# Altium PCB LockDoor.PcbDoc
Units mm, origin at the board's own origin, x right, y up, seen from the top; angles counter-clockwise.
Board outline 100 x 100 mm, 2 copper layers (Top Layer, Bottom Layer); 37 components, 57 nets, 201 pads, 84 vias.
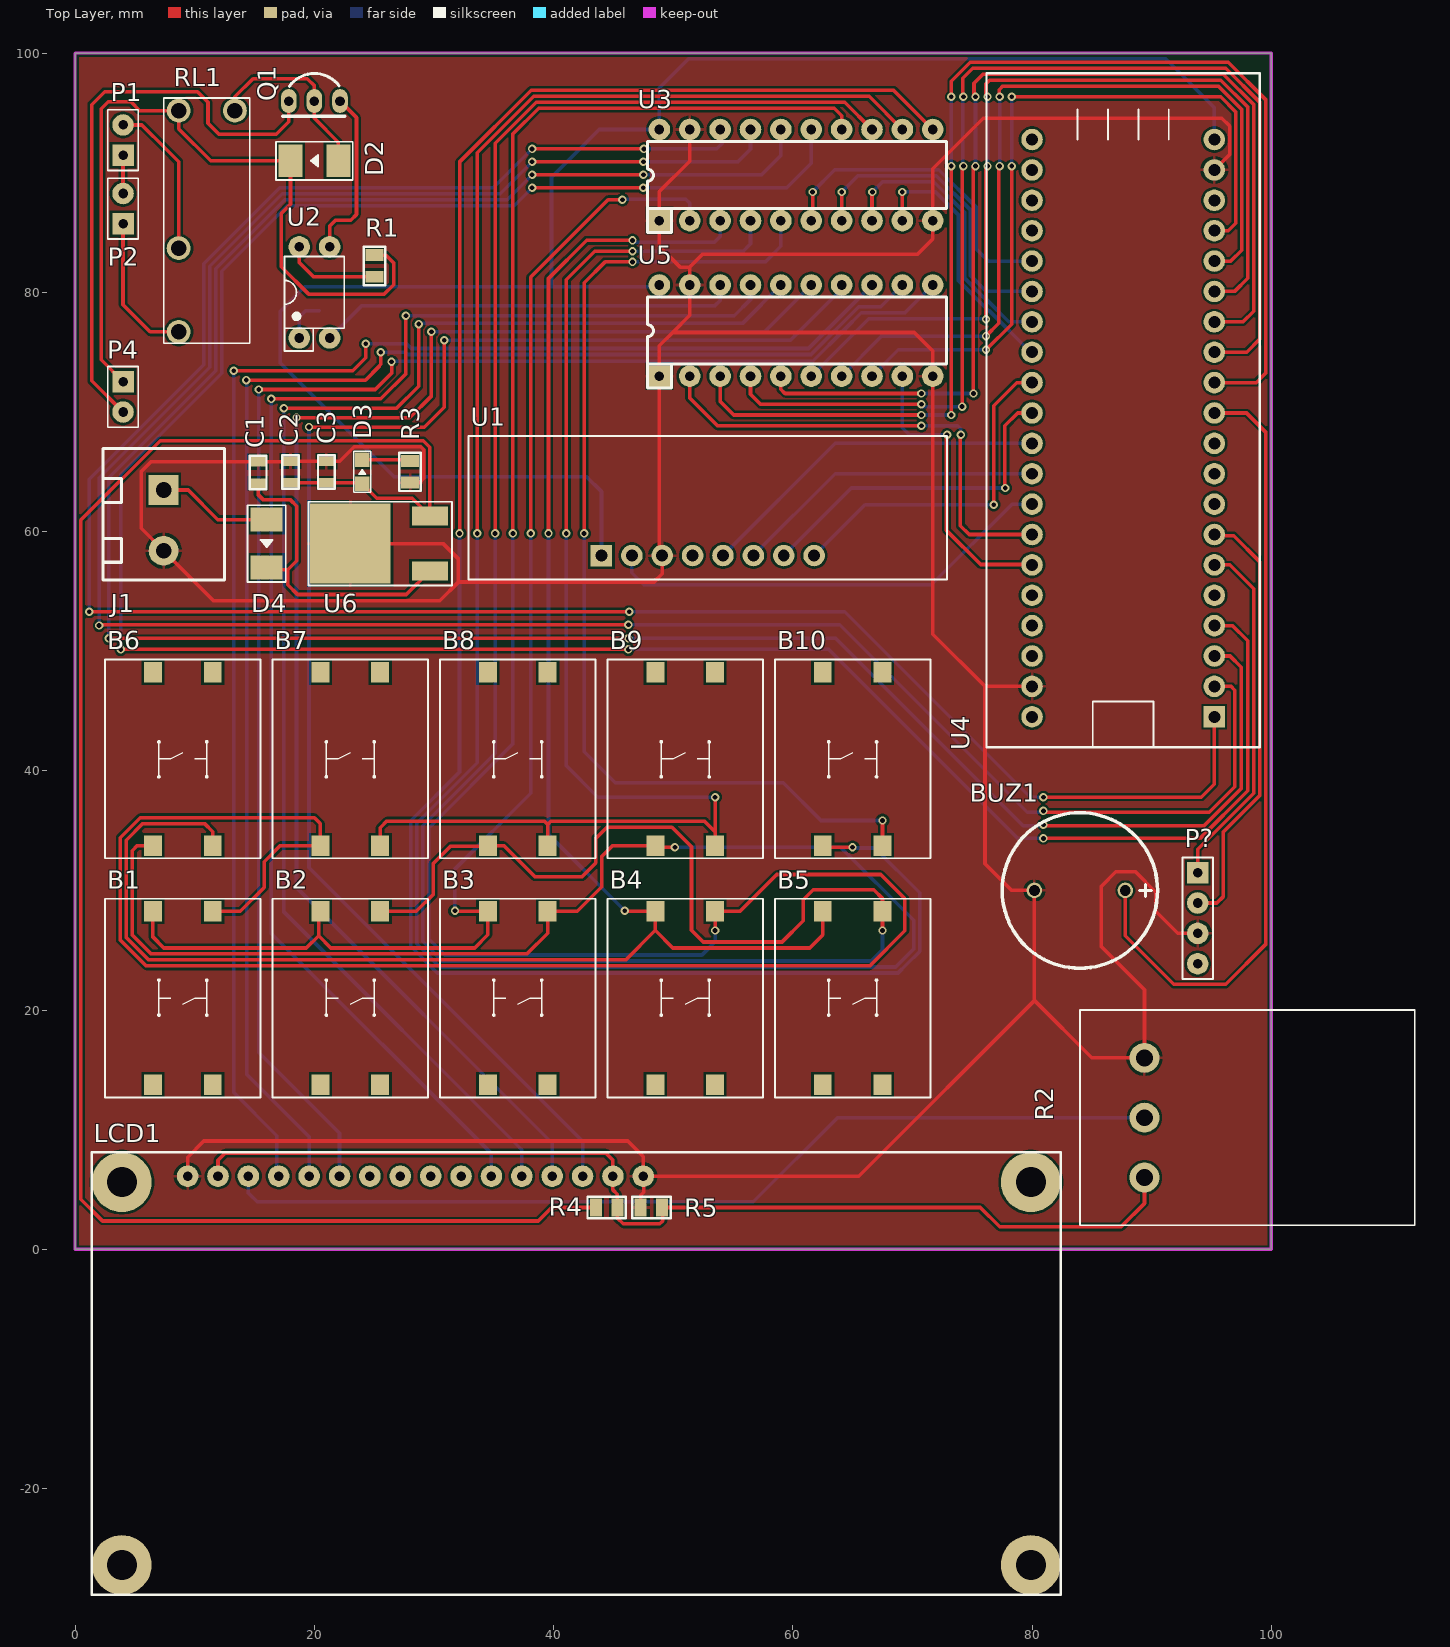
[diagram p0: Top Layer view]
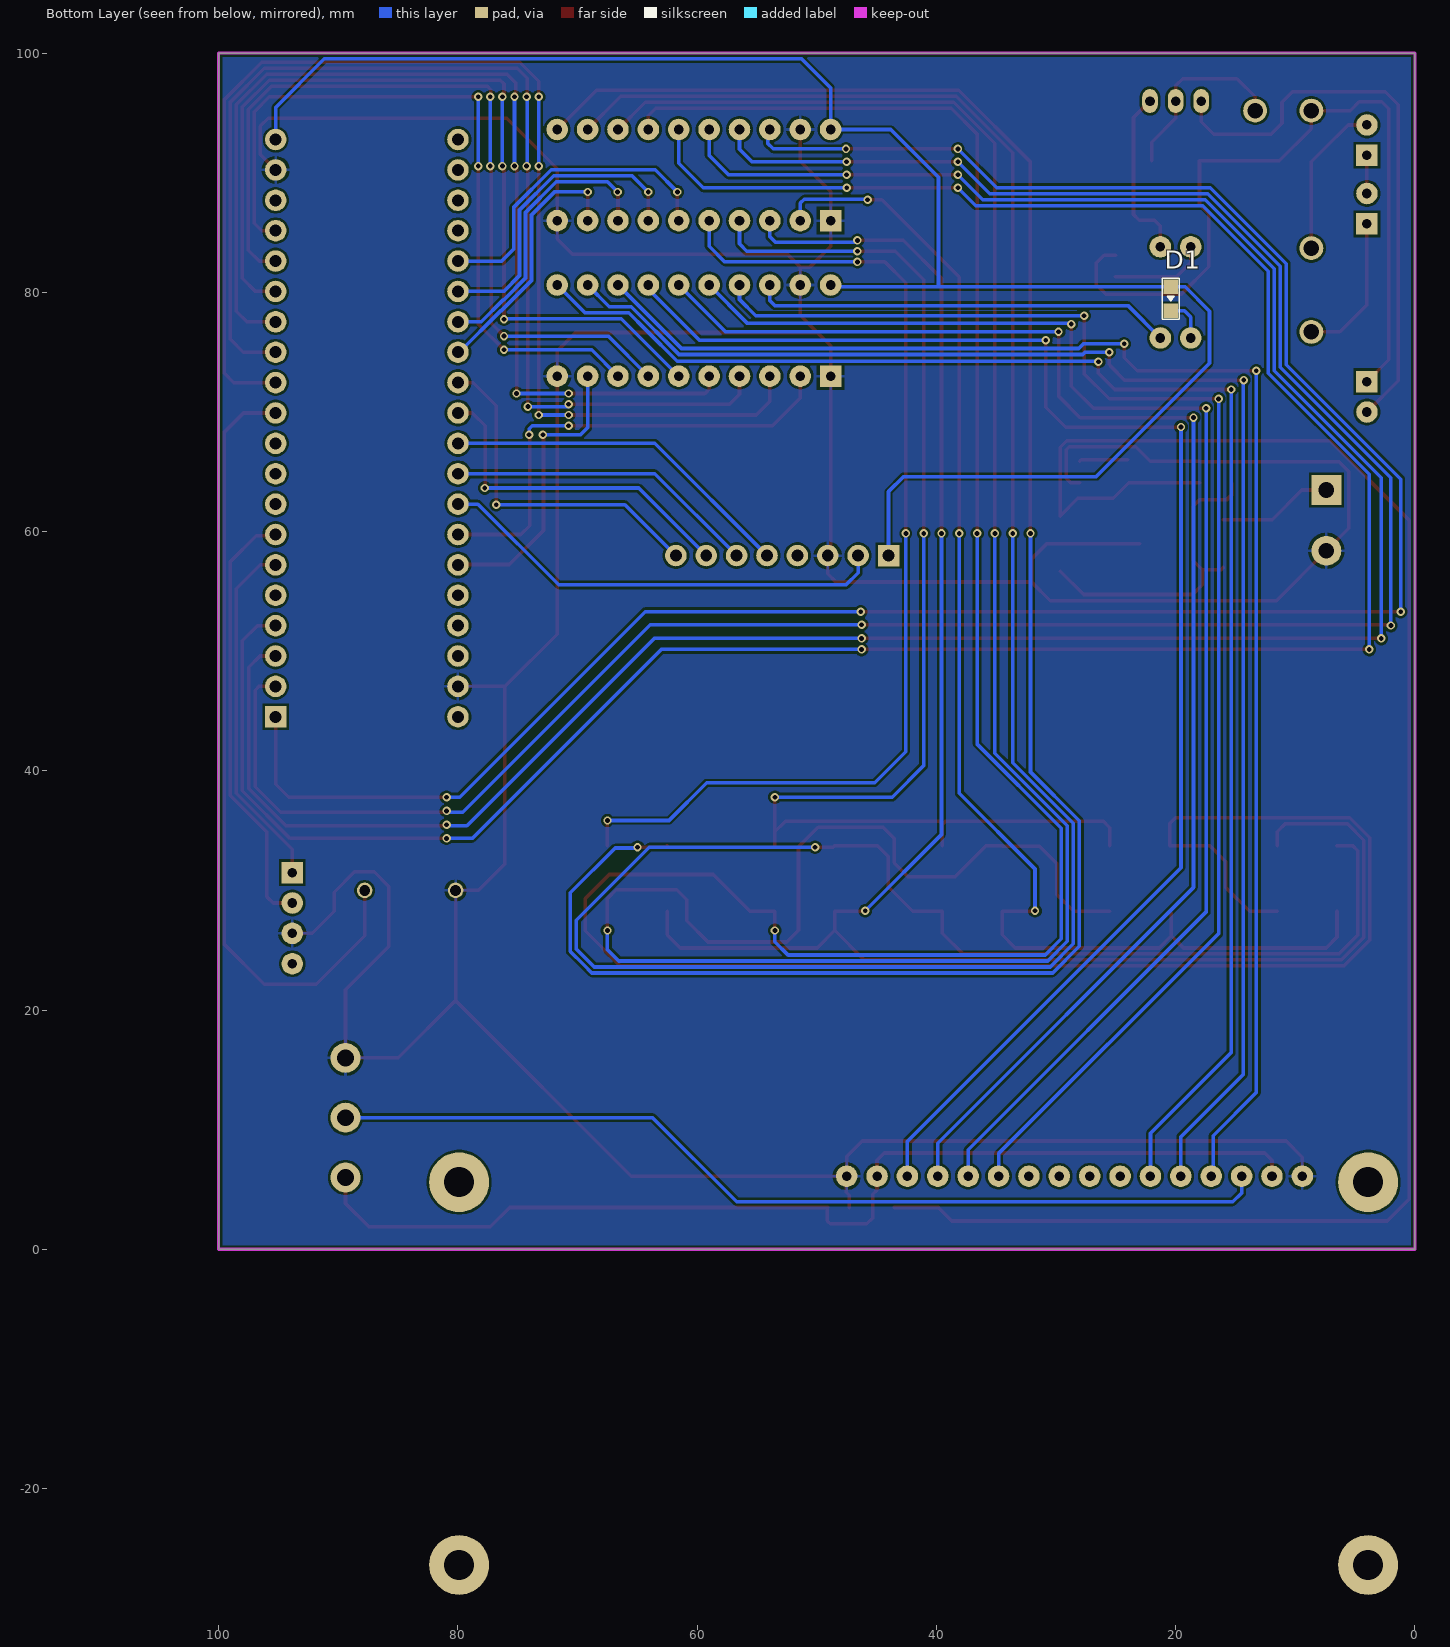
[diagram p1: Bottom Layer view, seen from below]
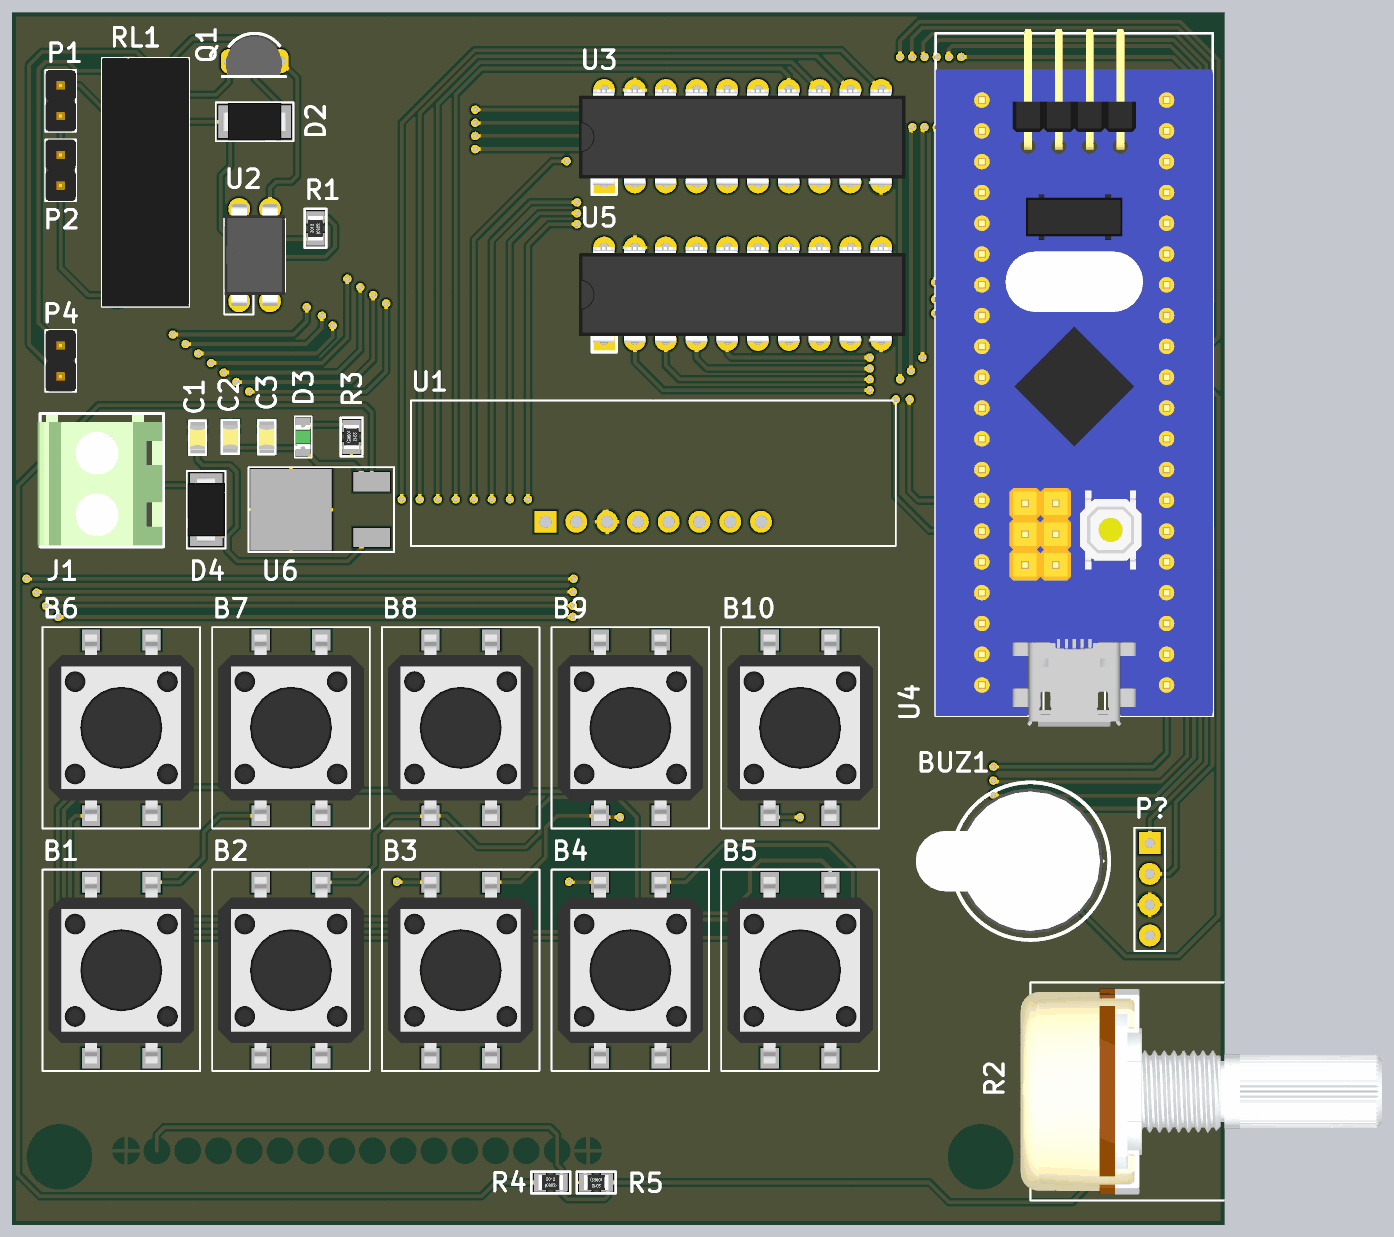
[diagram p2: 3D render of the assembled board from above, using the file's embedded part models]

## Layer stack, top to bottom
Top Solder: solder mask 0.0102, Solder Resist, Dk 3.5
Top Layer: signal copper 0.0356
Dielectric 1: dielectric 0.32, FR-4, Dk 4.8
Bottom Layer: signal copper 0.0356
Bottom Solder: solder mask 0.0102, Solder Resist, Dk 3.5

## Board outline
0,0 100,0 100,100 0,100

## Design rules (kind name [scope] priority, off if disabled: settings)
Clearance [All] p1: gap=0.2 ignorepadtopadclearanceinfootprint=FALSE
PolygonConnect [All] p1: connectstyle=Relief reliefconductorwidth=0.254 reliefentries=4 polygonreliefangle="90 Angle" airgapwidth=0.254
RoutingVias [All] p1: holewidth=0.4 width=0.7 viastyle="Through Hole" minholewidth=0.4 minwidth=0.7 maxholewidth=0.4 maxwidth=0.7
SolderMaskExpansion [All] p1: expansion=0.102 istentingtop=FALSE
Width [All] p1: maxlimit=0.3 minlimit=0.3 preferedwidth=0.3
30 further rules are at their usual default settings.

## Classes and differential pairs
component class Mircocontroller: C1 C2 C3 D3 D4 J1 P4 P? R3 R4 R5 U4 U5 U6
component class Interface: B1 B2 B3 B4 B5 B6 B7 B8 B9 B10 U3
component class Actuator: BUZ1 D1 D2 LCD1 P1 P2 Q1 R1 R2 RL1 U1 U2

## Components (designator, comment, footprint, x,y, rotation, side; value= is the part's Value field where it differs from the comment)
B1 "Button" BUTTON_B3F_SMD 9,21 r270 top
B2 "Button" BUTTON_B3F_SMD 23,21 r270 top
B3 "Button" BUTTON_B3F_SMD 37,21 r270 top
B4 "Button" BUTTON_B3F_SMD 51,21 r270 top
B5 "Button" BUTTON_B3F_SMD 65,21 r270 top
B6 "Button" BUTTON_B3F_SMD 9,41 r90 top
B7 "Button" BUTTON_B3F_SMD 23,41 r90 top
B8 "Button" BUTTON_B3F_SMD 37,41 r90 top
B9 "Button" BUTTON_B3F_SMD 51,41 r90 top
B10 "Button" BUTTON_B3F_SMD 65,41 r90 top
BUZ1 "Buzzer" Buzzer_7.6 84,30 r180 top
C1 "100nF" CAPC0805 15.29,64.94 r270 top
C2 "100nF" CAPC0805 18,65 r270 top
C3 "100nF" CAPC0805 21,64.98 r270 top
D1 "LED_Green" "LED SMD 0805" 20.4,79.47 r270 bottom
D2 "1N400x" 1N4007-M7 20,91 r180 top
D3 "LED_Green" "LED SMD 0805" 24,65 r90 top
D4 "1N400x" 1N4007-M7 16,59 r270 top
J1 "Domino 2 Pin" domino_2_pin 7.39,60.94 r270 top
LCD1 "LCD1602A" LCD1602A 41,-9.99 r0 top
P1 "Header 1*2 Pins" HDR_M_2_PINS_2.54 4,92.73 r90 top
P2 "Header 1*2 Pins" HDR_M_2_PINS_2.54 4,87 r90 top
P4 "Header 1*2 Pins" HDR_M_2_PINS_2.54 4,71.27 r270 top
P? "Header 1*4 Pins" HDR_M_4_PINS_2.54 93.85,27.68 r270 top
Q1 "NPN" to-92 20,96 r0 top
R1 "10kR" RESC0805 25.02,82.21 r90 top
R2 "POT" WH148-3P 96,11 r90 top
R3 "220R" RESC0805 28,65 r270 top
R4 "220R" RESC0805 44.43,3.49 r0 top
R5 "620R" RESC0805 48.18,3.49 r180 top
RL1 "Relay" "Relay G5NB" 11,86 r270 top
U1 "RFID" "RFID RC 522 Module" 52.89,58 r180 top
U2 "Optocoupler" "DIP 4" 20,80 r90 top
U3 "Non-Inverting Buffer" DIP_20 48.84,86 r90 top
U4 "STM32F103C8T6_BluePill" STM32F103C8T6_BluePill 87.62,68.65 r180 top
U5 "Non-Inverting Buffer" DIP_20 48.84,73 r90 top
U6 "LM7805" TO-252 23,59 r0 top

## Footprints (in the part's own frame and the unit in brackets; to place one, negate y for a bottom-side part, rotate by r counter-clockwise, add the part's x,y. Pads: shape width x height; smd on the part's side, far side on the other; paste and mask are expansions set on the pad)
1N4007-M7 [mm] "1N4007-M7"
  rect 2x2.7 smd: 1(-2,0) 2(2,0)
  silkscreen extent -3.2,-1.6 3.2,1.6, body extent -2.65,-1.55 2.65,1.55, height 2.5
BUTTON_B3F_SMD [mm] "4 Pins, SMD"
  rect 1.7x1.5 smd: 1(-7.25,2.5) 2(-7.25,-2.5) 3(7.25,2.5) 4(7.25,-2.5)
  silkscreen extent -8.3,-6.5 8.3,6.5, body extent -7.68,-6.01 7.68,6.01, height 7
Buzzer_7.6 [mm]
  round 1.3 hole 0.9: 1(-3.8,0) 2(3.8,0)
  silkscreen extent -6.5,-6.5 6.5,6.5, body extent -6,-6 9.45,6, height 9.65
CAPC0805 [mm] "Length: 2mm, Width: 1.3mm"
  rect 0.8x1.3 smd: 1(-0.9,0) 2(0.9,0)
  silkscreen extent -1.4,-0.7 1.4,0.7, body extent -1,-0.62 1,0.63, height 0.8
"DIP 4" [mm]
  round 1.8 hole 0.8: 1(-3.81,1.27) 2(-3.81,-1.27) 3(3.81,-1.27) 4(3.81,1.27)
  silkscreen extent -4.9,-2.5 3,2.5, body extent -4.57,-2.5 4.57,2.5, height 3.6
DIP_20 [mm]
  rect 1.8x1.8 hole 0.8: 1(0,0)
  round 1.8 hole 0.8: 2(0,-2.54) 3(0,-5.08) 4(0,-7.62) 5(0,-10.16) 6(0,-12.7) 7(0,-15.24) 8(0,-17.78) 9(0,-20.32) 10(0,-22.86) 11(7.62,-22.86) 12(7.62,-20.32) 13(7.62,-17.78) 14(7.62,-15.24) 15(7.62,-12.7) 16(7.62,-10.16) 17(7.62,-7.62) 18(7.62,-5.08) 19(7.62,-2.54) 20(7.62,0)
  silkscreen extent -1,-24 6.6,1, body extent -0.2,-24.86 7.67,2.06, height 5.33
domino_2_pin [mm]
  rect 2.5x2.5 hole 1.3: 1(-2.54,0)
  round 2.5 hole 1.3: 2(2.54,0)
  silkscreen extent -6,-5.08 5,5.08, body extent -5.88,-5.3 4.88,5, height 14.19
HDR_M_2_PINS_2.54 [mm] "0.65x0.45, Male, distance = 2.54mm, straight"
  rect 1.8x1.8 hole 0.8: 1(-1.27,0)
  round 1.8 hole 0.8: 2(1.27,0)
  silkscreen extent -2.54,-1.27 2.54,1.27, body extent -2.54,-1.27 2.54,1.27, height 9.89
HDR_M_4_PINS_2.54 [mm] "0.65x0.45, Male, distance = 2.54mm, straight"
  rect 1.8x1.8 hole 0.8: 1(-3.81,0)
  round 1.8 hole 0.8: 2(-1.27,0) 3(1.27,0) 4(3.81,0)
  silkscreen extent -5.08,-1.27 5.08,1.27, body extent -5.08,-1.2 5.08,1.3, height 8.66
LCD1602A [mm]
  round 1.8 hole 0.8: 1(-31.6,16.1) 2(-29.06,16.1) 3(-26.52,16.1) 4(-23.98,16.1) 5(-21.44,16.1) 6(-18.9,16.1) 7(-16.36,16.1) 8(-13.82,16.1) 9(-11.28,16.1) 10(-8.74,16.1) 11(-6.2,16.1) 12(-3.66,16.1) 13(-1.12,16.1) 14(1.42,16.1) 15(3.96,16.1) 16(6.5,16.1)
  round 5 hole 2.5: 18(-37.1,15.6) 19(38.9,15.6) 20(38.9,-16.4) 21(-37.1,-16.4)
  silkscreen extent -39.6,-18.9 41.4,18.1, body extent -39.6,-17.9 40.4,18.1, height 9.8
"LED SMD 0805" [mm] "SMD 0805"
  rect 1.2x1.2 smd: 1(-1,0) 2(1,0)
  silkscreen extent -1.7,-0.7 1.7,0.7, body extent -1,-0.63 1,0.62, height 0.8
"Relay G5NB" [mm] "4 Pins"
  round 2 hole 1.3: 1(-9.2,-2.35) 2(2.3,-2.35) 3(9.3,-2.35) 4(-9.2,2.35)
  silkscreen extent -10.25,-3.6 10.25,3.6, body extent -10.25,-3.6 10.25,3.6, height 15.3
RESC0805 [mm] "Length: 2mm, Width: 1.3mm"
  rect 1x1.5 smd: 1(-0.9,0) 2(0.9,0)
  silkscreen extent -1.6,-0.9 1.6,0.9, body extent -1,-0.63 1,0.63, height 0.45
"RFID RC 522 Module" [mm]
  rect 1.8x1.8 hole 1: 1(8.89,0)
  round 1.8 hole 1: 2(6.35,0) 3(3.81,0) 4(1.27,0) 5(-1.27,0) 6(-3.81,0) 7(-6.35,0) 8(-8.89,0)
  silkscreen extent -20,-10 20,2
STM32F103C8T6_BluePill [mm] "STM32F103C8T6_BluePill"
  rect 1.8x1.8 hole 1: 1(-7.62,24.13)
  round 1.8 hole 1: 2(-7.62,21.59) 3(-7.62,19.05) 4(-7.62,16.51) 5(-7.62,13.97) 6(-7.62,11.43) 7(-7.62,8.89) 8(-7.62,6.35) 9(-7.62,3.81) 10(-7.62,1.27) 11(-7.62,-1.27) 12(-7.62,-3.81) 13(-7.62,-6.35) 14(-7.62,-8.89) 15(-7.62,-11.43) 16(-7.62,-13.97) 17(-7.62,-16.51) 18(-7.62,-19.05) 19(-7.62,-21.59) 20(-7.62,-24.13) 21(7.62,-24.13) 22(7.62,-21.59) 23(7.62,-19.05) 24(7.62,-16.51) 25(7.62,-13.97) 26(7.62,-11.43) 27(7.62,-8.89) 28(7.62,-6.35) 29(7.62,-3.81) 30(7.62,-1.27) 31(7.62,1.27) 32(7.62,3.81) 33(7.62,6.35) 34(7.62,8.89) 35(7.62,11.43) 36(7.62,13.97) 37(7.62,16.51) 38(7.62,19.05) 39(7.62,21.59) 40(7.62,24.13)
  silkscreen extent -11.43,-29.67 11.43,26.67, body extent -11.43,-30.01 11.43,27.55, height 12.77
to-92 [mm] "TO-92"
  oval 1.3x2 hole 0.8: 1(-2.14,0) 2(0,0) 3(2.14,0)
  silkscreen extent -2.66,-1.27 2.54,2.3, body extent -2.38,-1.14 2.26,2.06, height 5
TO-252 [mm] "DPAK"
  rect 3x1.6 smd: 1(6.65,-2.3) 3(6.65,2.3)
  rect 6.7x6.7 smd: 2(0,0)
  silkscreen extent -3.5,-3.5 8.5,3.5, body extent -2.15,-3.21 6.55,3.29, height 2.5
WH148-3P [mm] "3 Pins, 0.125W, WH148"
  round 2.5 hole 1.4: 1(-5,6.6) 2(0,6.6) 3(5,6.6)
  silkscreen extent -9,-16 9,12, body extent -8.5,-17 8.5,12.8, height 23.5

## Part data
B1 B2 B3 B4 B5 B6 B7 B8 B9 B10: "6x6mm, TH, 2 Pins"
C1 C2 C3: library part "Capacitor Non Polar", "Capacitor_Non_Polar"
D2 D4: library part "Diode 1N4007", "1A - 1kV"
J1: "2 Pins, 5.08mm"
P1 P2 P4: library part "Header 1x2 Pins"
P?: library part "Header 1x4 Pins"
Q1: library part 2SC1815, "Transistor NPN"
R1 R3 R4 R5: library part Resistor, "Resistor_TH_1/4W"
R2: library part POT_3Pins
RL1: library part "Relay G5NB", "4 Pins"
U1: library part "RFID RC522 Module"
U2: "Opto"
U3 U5: library part 74HC541
U4: "STM32F103C8T6 BluePill"
U6: "5V, 1A"

## Via types
v1: diameter 0.7, hole 0.4, Top Layer to Bottom Layer, 84 vias

## Nets (pads, with @x,y where several pads share a name; then routed paths per layer and width w, separated by ;. In a path a pad name is that pad's centre, name@x,y a point inside that pad or via, vN(x,y) a via of type N, cw(c..) or ccw(c..) an arc to the next point about the centre after c; other vN are vias at no path point)
3.7V: LCD1.2 LCD1.15 R2.1 R4.2 R5.1 | length 89.1
  Top Layer w0.3: LCD1.2 11.94,7.44 12.55,8.05 44.35,8.05 44.96,7.44 LCD1.15 44.96,4.96 45.33,4.59 R4.2 45.33,2.61 45.82,2.12 48.88,2.12 49.13,2.37 49.13,3.44 R5.1 75.67,3.49 77.29,1.87 87.44,1.87 89.4,3.83 R2.1
3V3: D1.1 U1.1 U3.20 U4.20 U5.20 | length 148.6
  Bottom Layer w0.3: U1.1 44,63.35 42.75,64.6 26.65,64.6 17.16,74.09 17.16,78.43 19.2,80.47 D1.1 39.82,80.47 ; U5.20 48.69,80.47 39.82,80.47 ; U4.20 95.24,95.46 91.177,99.523 51.273,99.523 48.84,97.09 U3.20 43.82,93.62 39.82,89.62 39.82,80.47
5V: C2.2 C3.2 D3.1 R4.1 U6.3 | length 151.8
  Top Layer w0.3: C2.2 20.98,64.1 C3.2 23.92,64.08 D3.1 25.22,62.78 28.17,62.78 U6.3 29.65,67.05 29.1,67.6 22.24,67.6 7.11,67.6 0.477,60.967 0.477,4.173 2.29,2.36 38.71,2.36 39.84,3.49 R4.1
5V_O: D2.2 P4.1 R1.2 RL1.1 | length 66.1
  Top Layer w0.3: P4.1 2.17,74.37 2.17,95.35 2.76,95.94 4.66,95.94 5.4,95.2 RL1.1 8.65,93.67 11.32,91 D2.2 18,87.37 17.22,86.59 17.22,82.15 19.51,79.86 25.84,79.86 26.63,80.65 26.63,82.46 25.98,83.11 R1.2
GND: BUZ1.2 C1.1 C2.1 C3.1 J1.2 LCD1.1 LCD1.16 P?.3 R2.3 R3.2 R5.2 U1.3 U3.1 U3.10 U3.19 U4.19 U4.39 U5.1 U5.10 U5.19 U6.2 | length 398.5
  Top Layer w0.3: LCD1.1 9.4,7.7 10.75,9.05 46.2,9.05 47.5,7.75 LCD1.16 ; U6.2 30.75,59 32.04,57.71 32.04,55.79 ; R3.2 28.8,64.1 29.15,64.45 29.15,66.843 28.893,67.1 23.34,67.1 22.12,65.88 C3.1 20.99,65.89 17.99,65.89 17.94,65.84 C1.1 6.33,65.84 5.52,65.03 5.52,60.27 J1.2 11.56,54.23 30.48,54.23 32.04,55.79 ; R5.2 47.28,4.51 47.53,4.76 47.53,6.08 LCD1.16 ; U3.19 51.38,90.97 48.84,88.43 U3.1 48.84,83.85 50.57,82.12 51.38,82.12 ; U4.39 76.07,47.06 ; P?.3 92.19,26.41 90.35,28.25 90.35,29.85 88.65,31.55 87,31.55 85.8,30.35 85.8,25.3 89.4,21.7 R2.3 85,16 80.2,20.8 ; U4.19 96.523,91.523 96.523,93.907 95.86,94.57 75.92,94.57 71.7,90.35 U3.10 71.7,84.47 70.42,83.19 52.45,83.19 51.38,82.12 ; 32.04,55.79 48.39,55.79 49.08,56.48 U1.3 48.84,58.24 U5.1 48.84,75.54 49.95,76.65 ; LCD1.16 65.51,6.11 80.2,20.8 ; 49.95,76.65 70.15,76.65 71.7,75.1 U5.10 71.7,51.43 76.07,47.06 ; 49.95,76.65 51.38,78.08 U5.19 51.38,82.12 ; 76.07,47.06 76.07,32.23 78.3,30 BUZ1.2 80.2,20.8
GND_O: P4.2 Q1.1 | length 48.3
  Top Layer w0.3: P4.2 1.39,72.61 1.39,95.7 2.46,96.77 10.22,96.77 11.1,95.89 11.1,94.14 12.02,93.22 16.8,93.22 17.86,94.28 Q1.1
NetBUZ1_1: BUZ1.1 U4.11 | length 66.4
  Top Layer w0.3: BUZ1.1 87.8,26.2 91.85,22.15 96.2,22.15 99.523,25.473 99.523,28.753 99.523,68.327 97.93,69.92 U4.11
NetC1_2: C1.2 D4.2 U6.1 | length 26.3
  Top Layer w0.3: C1.2 15.29,63.1 15.74,62.65 18,62.65 18.52,62.13 18.52,57.56 17.76,56.8 ; D4.2 16.2,56.8 17.76,56.8 ; U6.1 27.69,54.74 18.59,54.74 17.76,55.57 17.76,56.8
NetD1_2: D1.2 U2.1 | length 3.6
  Bottom Layer w0.3: U2.1 18.73,77.94 19.26,78.47 D1.2
NetD2_1: D2.1 Q1.2 RL1.4 | length 15.8
  Top Layer w0.3: RL1.4 13.35,96.35 14.87,97.87 19.4,97.87 20,97.27 Q1.2 20,94.55 22,92.55 D2.1
NetD3_2: D3.2 R3.1 | length 4
  Top Layer w0.3: D3.2 27.9,66 R3.1
NetD4_1: D4.1 J1.1 | length 9.6
  Top Layer w0.3: J1.1 9.45,63.48 11.93,61 D4.1
NetLCD1_4: LCD1.4 U5.13 | length 126.2
  Top Layer w0.3: v1(13.25,73.45) 23.2,73.45 24.3,74.55 v1(24.3,75.7)
  Bottom Layer w0.3: v1(13.25,73.45) 13.25,13.1 16.85,9.5 16.85,6.28 LCD1.4 ; v1(24.3,75.7) 27.7,75.7 28.092,75.308 61.308,75.308 U5.13
NetLCD1_5: LCD1.5 U5.12 | length 127.5
  Top Layer w0.3: v1(14.3,72.667) 24.267,72.667 25.4,73.8 25.4,73.833 25.55,73.983 v1(25.55,75)
  Bottom Layer w0.3: v1@14.343,72.508 14.343,14.607 19.56,9.39 LCD1.5 ; v1(25.55,75) 27.576,75 27.768,74.808 61.515,74.808 65.507,78.8 67.34,78.8 U5.12
NetLCD1_6: LCD1.6 U5.11 | length 129.1
  Top Layer w0.3: v1(15.35,71.883) 25.083,71.883 26.45,73.25 v1(26.45,74.2)
  Bottom Layer w0.3: v1(15.35,71.883) 15.35,16.45 22.1,9.7 LCD1.6 ; v1(26.45,74.2) 26.5,74.25 61.664,74.25 64.314,76.9 65.714,78.3 69.38,78.3 U5.11
NetLCD1_11: LCD1.11 U5.17 | length 120.2
  Top Layer w0.3: v1(16.4,71.1) 25.55,71.1 27.65,73.2 27.65,74.21 v1(27.65,78.05)
  Bottom Layer w0.3: v1(16.4,71.1) 16.4,26.4 34.8,8 LCD1.11 ; v1(27.65,78.05) 55.1,78.05 56.46,79.41 U5.17
NetLCD1_12: LCD1.12 U5.16 | length 121.5
  Top Layer w0.3: v1(17.45,70.317) 26.867,70.317 28.717,72.167 v1(28.717,77.35)
  Bottom Layer w0.3: v1(17.45,70.317) 17.45,28.2 37.34,8.31 LCD1.12 ; v1@28.519,77.315 28.681,77.315 v1(28.717,77.35) 28.775,77.408 55.788,77.408 U5.16
NetLCD1_13: LCD1.13 U5.15 | length 123.1
  Top Layer w0.3: v1(18.5,69.533) 27.983,69.533 29.783,71.333 v1(29.783,76.708)
  Bottom Layer w0.3: v1(18.5,69.533) 18.5,30.25 39.88,8.87 LCD1.13 ; v1(29.783,76.708) 57.628,76.708 U5.15
NetLCD1_14: LCD1.14 U5.14 | length 125.1
  Top Layer w0.3: v1(19.55,68.75) 19.561,68.739 29.189,68.739 30.85,70.4 v1(30.85,76.008)
  Bottom Layer w0.3: v1(19.55,68.75) 19.55,31.9 42.42,9.03 LCD1.14 ; v1(30.85,76.008) 59.808,76.008 64.08,80.28 U5.14
NetP1_1: P1.1 P2.2 | length 3.2
  Top Layer w0.3: P2.2 P1.1
NetP1_2: P1.2 RL1.2 | length 13.1
  Top Layer w0.3: P1.2 5.57,94 7.56,92.01 8.65,90.92 RL1.2
NetP2_1: P2.1 RL1.3 | length 12.4
  Top Layer w0.3: P2.1 4,78.96 6.26,76.7 RL1.3
NetQ1_3: Q1.3 U2.3 | length 14.4
  Top Layer w0.3: U2.3 21.27,85.55 21.76,86.04 23.04,86.04 23.52,86.52 23.52,94.62 Q1.3
NetR1_1: R1.1 U2.4 | length 8.1
  Top Layer w0.3: U2.4 18.73,82.5 19.92,81.31 R1.1
NetU1_2: U1.2 U4.33 | length 38.1
  Bottom Layer w0.3: U1.2 46.54,56.56 47.55,55.55 64.32,55.55 71.58,55.55 78.33,62.3 U4.33
NetU1_5: U1.5 U4.31 | length 29.7
  Bottom Layer w0.3: U1.5 63.54,67.38 U4.31
NetU1_6: U1.6 U4.32 | length 26.1
  Bottom Layer w0.3: U1.6 63.54,64.84 U4.32
NetU1_7: U1.7 U4.30 | length 28.9
  Top Layer w0.3: v1(77.76,63.65) 77.72,63.61 77.72,68.84 78.8,69.92 U4.30
  Bottom Layer w0.3: U1.7 64.89,63.65 v1(77.76,63.65)
NetU1_8: U1.8 U4.29 | length 29.1
  Top Layer w0.3: v1(76.8,62.25) 76.8,70.53 78.73,72.46 U4.29
  Bottom Layer w0.3: U1.8 66.04,62.26 76.79,62.26 v1(76.8,62.25)
NetU2_2: U2.2 U5.18 | length 35.2
  Bottom Layer w0.3: U2.2 23.98,78.9 53.5,78.9 53.92,79.32 U5.18
NetU3_6: U3.6 U4.25 | length 26.8
  Top Layer w0.3: U3.6 61.65,86.11 v1(61.65,88.4)
  Bottom Layer w0.3: v1(61.65,88.4) 63.5,90.25 72.2,90.25 75.35,87.1 75.35,83.6 76.33,82.62 U4.25
NetU3_7: U3.7 U4.26 | length 26
  Top Layer w0.3: U3.7 64.08,88.258 v1@64.094,88.272
  Bottom Layer w0.3: v1(64.094,88.4) 65.444,89.75 71.993,89.75 74.85,86.893 74.85,81.407 76.177,80.08 U4.26
NetU3_8: U3.8 U4.27 | length 24.1
  Top Layer w0.3: U3.8 66.62,88.32 v1@66.65,88.35
  Bottom Layer w0.3: v1(66.65,88.4) 67.5,89.25 71.786,89.25 74.35,86.686 74.35,81.2 76.18,79.37 76.227,79.37 78.057,77.54 U4.27
NetU3_9: U3.9 U4.28 | length 21.9
  Top Layer w0.3: v1@69.15,88.3 69.16,88.29 U3.9
  Bottom Layer w0.3: v1(69.15,88.4) 71.929,88.4 73.85,86.479 73.85,80.993 76.393,78.45 76.44,78.45 79.89,75 U4.28
NetU3_15: U3.15 U4.4 | length 209
  Top Layer w0.3: v1(3.8,50.15) v1(46.25,50.15) ; v1(38.2,88.75) v1(47.5,88.75) ; v1@80.9,34.35 v1(80.95,34.35) 94.036,34.35 98.023,38.337 98.023,50.877 96.76,52.14 U4.4
  Bottom Layer w0.3: v1@3.8,50.37 3.8,64.8 12.25,73.25 12.25,81.779 17.721,87.25 36.7,87.25 v1(38.2,88.75) ; v1(46.25,50.15) 63,50.15 78.8,34.35 v1@80.9,34.35 ; v1(47.5,88.75) 59.5,88.75 61.54,90.79 U3.15
NetU3_16: U3.16 U4.3 | length 203.2
  Top Layer w0.3: v1(2.8,51.07) v1(46.25,51.07) ; v1(38.2,89.833) v1(47.503,89.833) ; v1@80.95,35.4 94.379,35.4 97.5,38.521 97.5,48.65 96.55,49.6 U4.3
  Bottom Layer w0.3: v1(2.8,51.07) 2.8,64.507 11.75,73.457 11.75,81.986 17.514,87.75 36.117,87.75 v1(38.2,89.833) ; v1(46.25,51.07) 63.58,51.07 79.25,35.4 v1@80.95,35.4 ; v1(47.503,89.833) 57.383,89.833 59,91.45 U3.16
  other v1: 80.95,35.5
NetU3_17: U3.17 U4.2 | length 197.1
  Top Layer w0.3: v1(2,52.15) 2.07,52.22 v1(46.25,52.22) ; v1(38.2,90.917) v1(47.503,90.917) ; v1@80.9,36.55 94.822,36.55 96.95,38.678 96.95,46.75 96.64,47.06 U4.2
  Bottom Layer w0.3: v1(2,52.15) 2,64.5 11.25,73.75 11.25,82.193 17.307,88.25 35.533,88.25 v1(38.2,90.917) ; v1(46.25,52.22) 63.93,52.22 79.6,36.55 v1@80.9,36.55 ; v1(47.503,90.917) 55.417,90.917 56.46,91.96 U3.17
  other v1: 80.95,36.65
NetU3_18: U3.18 U4.1 | length 188.4
  Top Layer w0.3: v1(1.177,53.3) v1(46.32,53.3) ; v1(38.2,92) v1(47.55,92) ; v1@80.9,37.8 94.15,37.8 95.24,38.89 U4.1
  Bottom Layer w0.3: v1(1.177,53.3) 1.177,64.384 10.75,73.957 10.75,82.4 17.1,88.75 34.95,88.75 v1(38.2,92) ; v1(46.32,53.3) 64.35,53.3 79.85,37.8 v1(80.95,37.8) ; v1(47.55,92) 53.65,92 54.1,92.45 54.1,93.44 U3.18
"PIN C1": B1.1 B4.1 B7.1 U3.14 | length 256.5
  Top Layer w0.3: B1.1 13.81,28.25 15.81,30.25 15.81,32.41 17.15,33.75 B7.1 20.5,35.59 20,36.09 5.45,36.09 3.77,34.41 3.77,25.86 5.94,23.69 66.43,23.69 69.36,26.62 69.36,29.32 67.35,31.33 58.66,31.33 55.58,28.25 B4.1 v1(53.5,26.65) ; v1(36.596,59.85) 36.596,93.246 38.75,95.4 63.45,95.4 64.08,94.77 U3.14
  Bottom Layer w0.3: v1(36.596,59.85) 36.596,42.246 29.55,35.2 29.55,25.95 30.9,24.6 52.4,24.6 53.5,25.7 v1(53.5,26.65)
"PIN C2": B2.1 B5.1 B8.1 U3.13 | length 207.9
  Top Layer w0.3: B2.1 28.52,28.25 29.93,29.66 29.93,32.25 31.38,33.7 34.45,33.7 B8.1 35.83,33.75 38.42,31.16 42.39,31.16 43.53,32.3 43.53,34.35 44.46,35.28 49.89,35.28 51.53,33.64 51.53,26.67 52.51,25.69 59.1,25.69 60.87,27.46 60.87,29.21 61.71,30.05 66.77,30.05 67.5,29.32 B5.1 v1(67.5,26.65) ; v1(35.107,59.85) 35.107,92.464 38.543,95.9 64.34,95.9 U3.13
  Bottom Layer w0.3: v1(35.107,59.85) 35.107,41.464 29.05,35.407 29.05,25.743 30.693,24.1 66.55,24.1 67.5,25.05 v1(67.5,26.65)
"PIN C3": B3.1 B6.1 B9.1 U3.12 | length 236.1
  Top Layer w0.3: B6.1 5.2,33.75 4.77,33.32 4.77,26.274 6.354,24.69 37.76,24.69 39.5,26.43 B3.1 41.98,28.25 44.03,30.3 44.03,32.84 44.94,33.75 B9.1 48.63,33.62 v1(50.137,33.62) ; v1(33.619,59.85) 33.619,91.683 38.336,96.4 66.38,96.4 U3.12
  Bottom Layer w0.3: v1(33.619,59.85) 33.619,40.683 28.55,35.614 28.55,25.536 30.486,23.6 66.757,23.6 68.593,23.6 70.1,25.107 70.1,27.512 63.992,33.62 v1(50.137,33.62)
"PIN C4": B10.1 U3.11 | length 169.5
  Top Layer w0.3: v1(32.13,59.85) 32.136,59.856 32.136,60.174 32.136,90.908 38.129,96.9 68.42,96.9 U3.11 ; B10.1 62.637,33.613 v1(64.989,33.613)
  Bottom Layer w0.3: v1(32.13,59.85) 32.13,39.901 28.05,35.821 28.05,25.329 30.279,23.1 68.8,23.1 69.525,23.825 70.6,24.9 70.6,29.8 66.85,33.55 65.052,33.55 v1(64.989,33.613)
"PIN R1": B1.2 B2.2 B3.2 U3.2 | length 111.9
  Top Layer w0.3: B1.2 6.5,26.1 7.41,25.19 19.33,25.19 20.35,26.21 ; B2.2 20.35,28.1 20.35,26.21 ; v1(31.75,28.3) 31.8,28.25 B3.2 34.5,26.29 33.4,25.19 21.37,25.19 20.35,26.21 ; v1(38.084,59.85) 38.084,81.284 44.55,87.75 44.75,87.75 v1(45.75,87.75)
  Bottom Layer w0.3: v1(31.75,28.3) 31.75,31.8 38.084,38.134 v1(38.084,59.85) ; v1(45.75,87.75) 45.8,87.8 51.05,87.8 51.38,87.47 U3.2
"PIN R2": B4.2 B5.2 B6.2 U3.3 | length 157.4
  Top Layer w0.3: B6.2 11.5,34.9 10.81,35.59 5.657,35.59 4.27,34.203 4.27,26.067 6.147,24.19 46.03,24.19 48.5,26.66 ; v1(39.573,59.85) 39.573,81.166 42.757,84.35 v1@46.55,84.35 ; v1(45.95,28.3) 46,28.25 B4.2 48.5,26.66 ; B5.2 62.5,26.28 61.41,25.19 49.97,25.19 48.5,26.66
  Bottom Layer w0.3: v1(39.573,59.85) 39.573,34.677 v1(45.95,28.3) ; v1@46.55,84.35 46.7,84.2 53.45,84.2 53.92,84.67 U3.3
  other v1: 46.6,84.35
"PIN R3": B7.2 B8.2 B9.2 U3.4 | length 108.9
  Top Layer w0.3: B7.2 25.5,35.25 26.05,35.8 39.21,35.8 39.5,35.51 ; B8.2 39.5,35.51 ; v1(41.061,59.85) 41.061,81.061 43.45,83.45 v1@46.5,83.45 ; B9.2 53.5,34.9 ; v1(53.5,37.8) 53.5,34.9 ; 39.5,35.51 39.77,35.78 52.62,35.78 53.5,34.9
  Bottom Layer w0.3: v1(41.061,59.85) 41.061,40.439 43.7,37.8 v1(53.5,37.8) ; v1@46.5,83.45 v1(46.6,83.45) 55.85,83.45 56.46,84.06 U3.4
"PIN R4": B10.2 U3.5 | length 88.5
  Top Layer w0.3: v1(42.55,59.85) 42.55,80.8 44.3,82.55 v1@46.45,82.55 ; B10.2 v1(67.5,35.85)
  Bottom Layer w0.3: v1(42.55,59.85) 42.55,41.6 45.15,39 59.2,39 62.35,35.85 v1(67.5,35.85) ; v1@46.45,82.55 57.7,82.55 59,83.85 U3.5
  other v1: 46.6,82.55
PIN_D4: U4.12 U5.3 | length 105.5
  Top Layer w0.3: U5.3 53.92,70.88 55.05,69.75 v1(70.75,69.75) ; v1(73.25,69.75) v1@73.25,90.5 ; v1@73.25,96.4 73.25,97.664 74.836,99.25 96.4,99.25 99.523,96.127 99.523,73.25 98.733,72.46 U4.12
  Bottom Layer w0.3: v1(70.75,69.75) v1(73.25,69.75) ; v1@73.25,90.5 v1@73.25,96.4
  other v1: 73.25,90.56 73.25,96.35
PIN_D5: U4.13 U5.4 | length 97.6
  Top Layer w0.3: U5.4 56.46,71.49 57.3,70.65 v1(70.75,70.65) ; v1@74.148,90.56 74.148,70.452 v1(74.15,70.45) ; v1@74.2,96.4 74.2,97.907 75.043,98.75 96.193,98.75 99.023,95.92 99.023,76.073 97.95,75 U4.13
  Bottom Layer w0.3: v1(70.75,70.65) 70.75,70.45 v1(74.15,70.45) ; v1@74.148,90.56 74.2,90.612 v1@74.2,96.4
  other v1: 74.26,90.56 74.26,96.35
PIN_D6: U4.14 U5.5 | length 89
  Top Layer w0.3: U5.5 59,71.9 59.35,71.55 v1(70.75,71.55) ; v1@75.075,90.55 75.05,90.525 75.1,90.475 v1(75.1,71.55) ; v1@75.1,96.4 75.15,96.45 75.15,96.494 75.15,97.5 75.9,98.25 95.986,98.25 98.523,95.713 98.523,78.423 97.64,77.54 U4.14
  Bottom Layer w0.3: v1(70.75,71.55) v1(75.1,71.55) ; v1@75.1,96.35 75.27,96.18 v1(75.27,90.56)
  other v1: 75.27,96.35
PIN_D7: U4.15 U5.6 | length 76.7
  Top Layer w0.3: U5.6 U5.6@61.55,73.01 ; v1(76.15,77.75) v1@76.15,90.55 ; v1@76.15,96.45 76.15,97.45 76.45,97.75 95.779,97.75 98.023,95.506 98.023,81.173 96.93,80.08 U4.15
  Bottom Layer w0.3: U5.6 64.084,75.544 66.34,77.8 76.1,77.8 v1(76.15,77.75) ; v1(76.28,90.56) v1(76.28,96.35)
PIN_DOOR: U4.34 U5.2 | length 40
  Top Layer w0.3: U5.2 51.38,71.17 53.7,68.85 v1@70.9,68.85 ; v1@74.05,68.25 74,68.2 74,60.5 74.74,59.76 U4.34
  Bottom Layer w0.3: v1@70.9,68.85 73.8,68.85 74.05,68.6 v1@74.05,68.25
  other v1: 74.05,68.1 70.75,68.85
PIN_EN: U4.35 U5.9 | length 24.7
  Top Layer w0.3: v1(72.9,68.1) 72.85,68.05 72.85,60.1 75.7,57.25 79.97,57.25 U4.35
  Bottom Layer w0.3: U5.9 69.16,68.69 69.75,68.1 v1(72.9,68.1)
PIN_RS: U4.16 U5.7 | length 69.7
  Top Layer w0.3: v1(76.15,76.35) 77.225,77.425 v1@77.225,90.55 ; v1@77.25,96.4 77.25,96.95 77.55,97.25 95.572,97.25 97.523,95.299 97.523,83.523 96.62,82.62 U4.16
  Bottom Layer w0.3: U5.7 67.43,76.35 75.775,76.35 ; v1(77.29,90.56) v1(77.29,96.35)
PIN_RW: U4.17 U5.8 | length 62.8
  Top Layer w0.3: v1(76.15,75.2) 78.3,77.35 v1@78.3,90.65 ; v1(78.3,96.35) 95.764,96.35 97.023,95.091 97.023,85.773 96.41,85.16 U4.17
  Bottom Layer w0.3: U5.8 68.82,75.2 75.775,75.2 ; v1@78.3,90.55 v1(78.3,96.35)
  other v1: 78.3,90.56
RX: P?.2 U4.7 | length 36.3
  Top Layer w0.3: P?.2 95.45,28.95 96,29.5 96,34.9 99.023,37.923 99.023,57.497 96.86,59.66 95.34,59.66 U4.7
TX: P?.1 U4.6 | length 29.8
  Top Layer w0.3: P?.1 93.85,33.457 98.523,38.13 98.523,55.227 96.53,57.22 U4.6
V0: LCD1.3 R2.2 | length 79.6
  Bottom Layer w0.3: LCD1.3 14.48,4.7 15.22,3.96 56.69,3.96 63.73,11 R2.2
pads on no net: B1.3 B1.4 B2.3 B2.4 B3.3 B3.4 B4.3 B4.4 B5.3 B5.4 B6.3 B6.4 B7.3 B7.4 B8.3 B8.4 B9.3 B9.4 B10.3 B10.4 LCD1.7 LCD1.8 LCD1.9 LCD1.10 LCD1.18 LCD1.19 LCD1.20 LCD1.21 P?.4 U1.4 U4.5 U4.8 U4.9 U4.10 U4.18 U4.21 U4.22 U4.23 U4.24 U4.36 U4.37 U4.38 U4.40

## Polygon pours and split planes (outlines as drawn)
GND on Top Layer "GND_L01_P001" (solid, remove dead copper, pour order 1): 0,100 0,0 100,0 100,100
GND on Bottom Layer "GND_L02_P002" (solid, remove dead copper, pour order 2): 0,100 0,0 100,0 100,100

## Keep-outs
Keep-Out Layer:
  the board outline again, w0.254